# Altium PCB PCB.PcbDoc
Units mm, origin at the board's own origin, x right, y up, seen from the top; angles counter-clockwise.
Board outline 88.9 x 65.79 mm, 2 copper layers (Top Layer, Bottom Layer); 55 components, 33 nets, 171 pads, 169 vias.
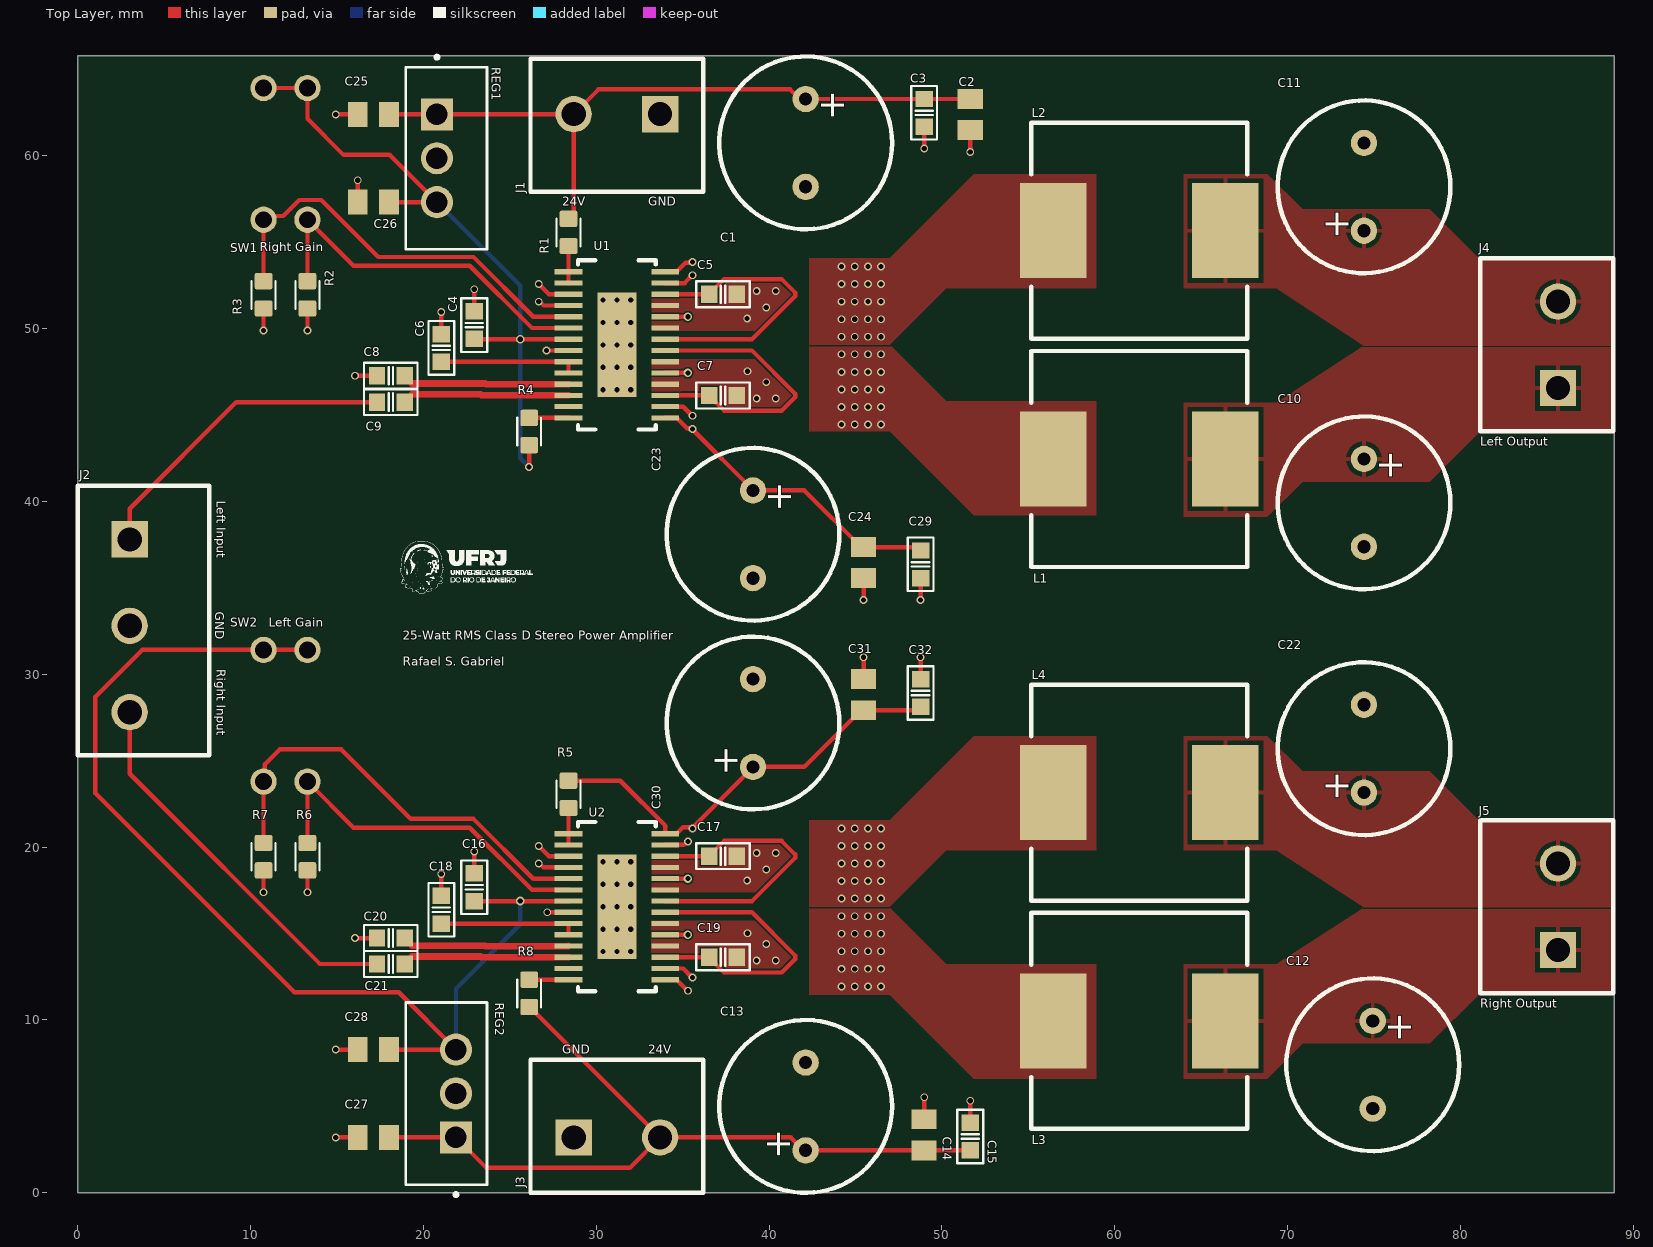
[diagram p0: Top Layer view]
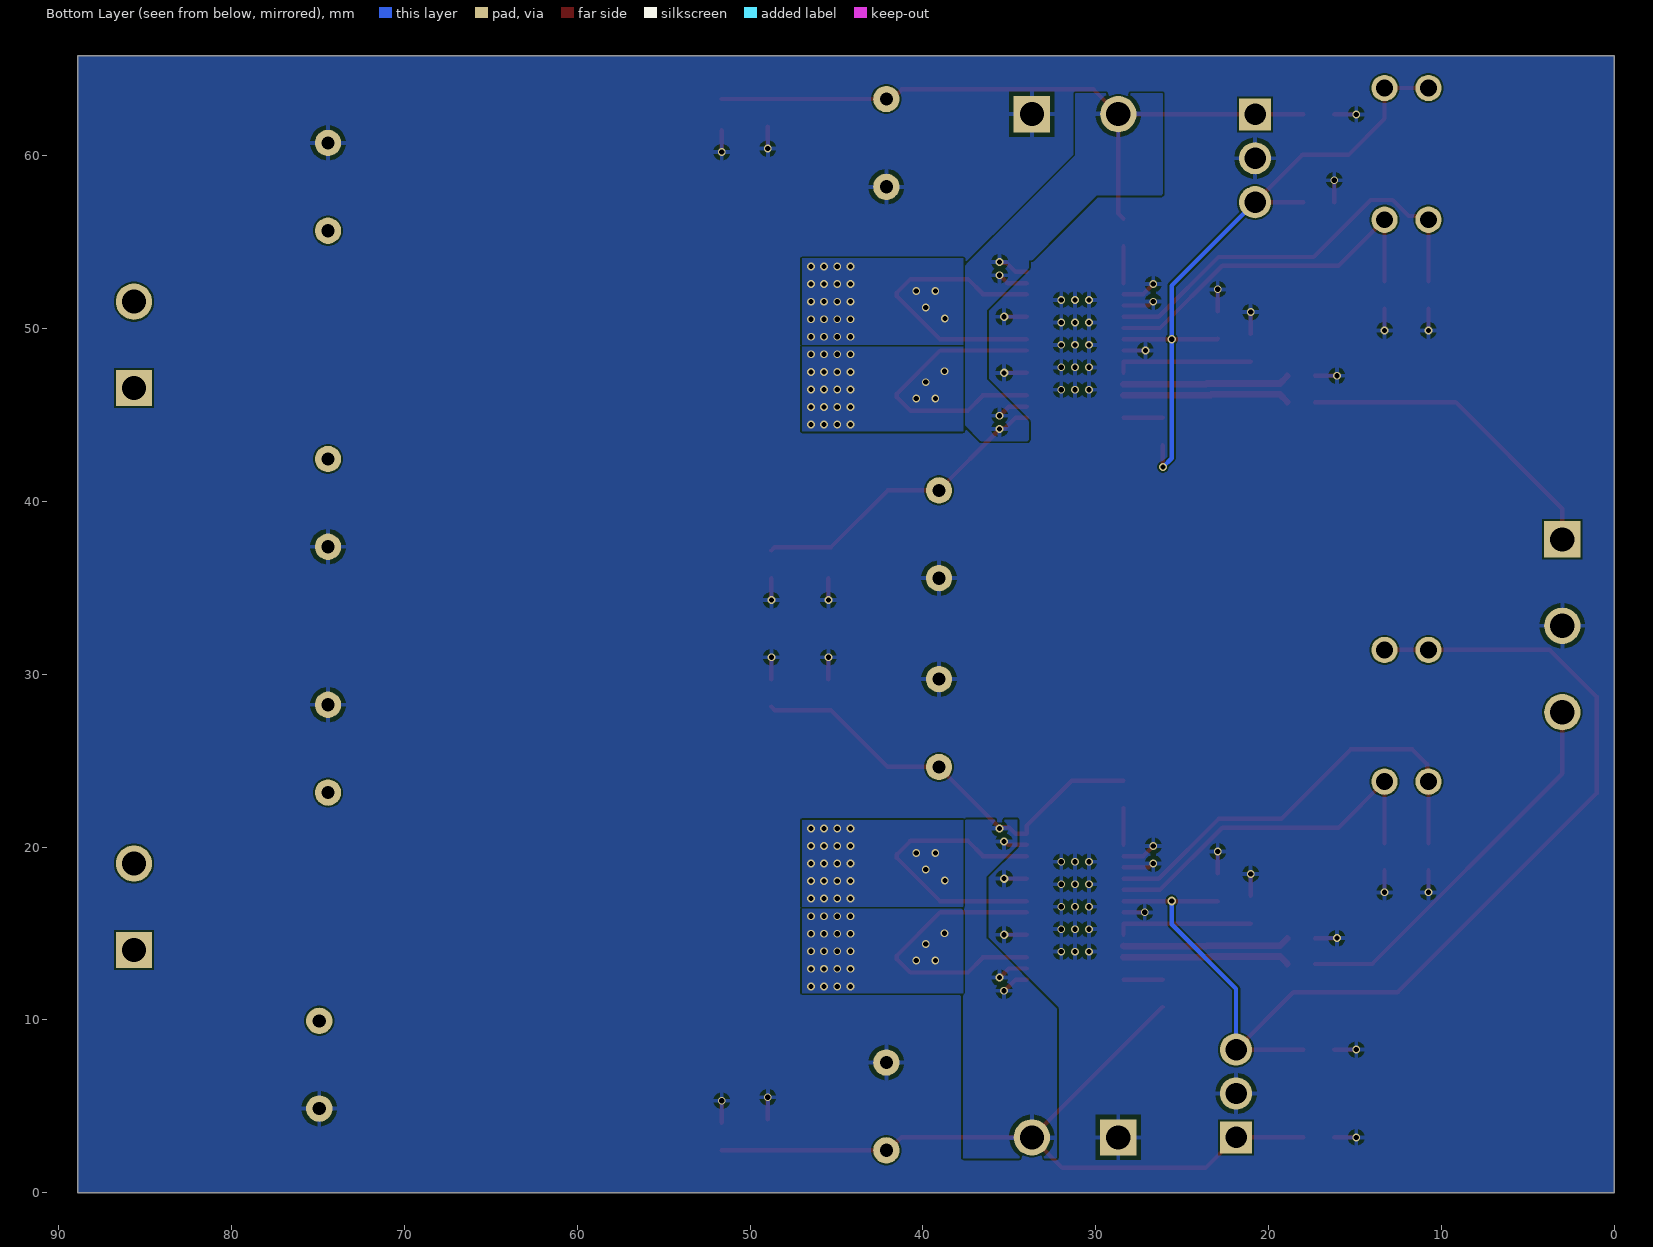
[diagram p1: Bottom Layer view, seen from below]
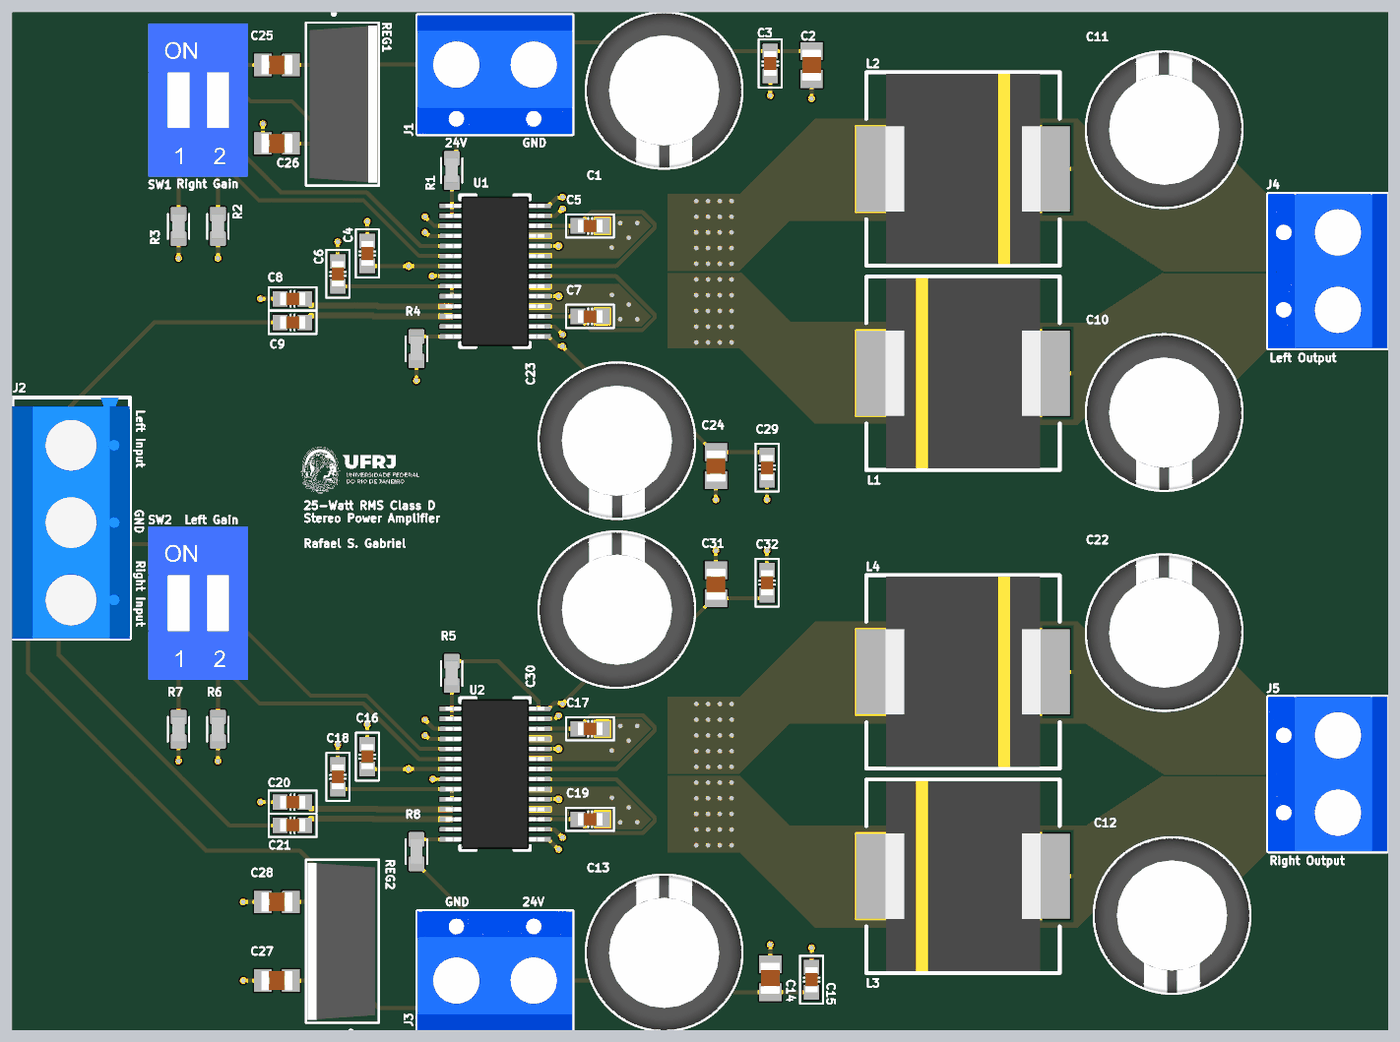
[diagram p2: 3D render of the assembled board from above, using the file's embedded part models]

## Layer stack, top to bottom
Top Solder: solder mask 0.0102, Solder Resist, Dk 3.5
Top Layer: signal copper 0.0356
Dielectric 1: dielectric 0.32, FR-4, Dk 4.8
Bottom Layer: signal copper 0.0356
Bottom Solder: solder mask 0.0102, Solder Resist, Dk 3.5

## Board outline
0,0 0,65.786 88.9,65.786 88.9,0

## Design rules (kind name [scope] priority, off if disabled: settings)
Clearance [All] p1: gap=0.1 ignorepadtopadclearanceinfootprint=FALSE except(0.15: SMDPad-SMDPad)
DiffPairsRouting [All] p1: maxlimit=0.254 minlimit=0.254 mostfreqgap=0.254 toplayer_minwidth=0.381 toplayer_maxwidth=0.381 toplayer_prefwidth=0.381 bottomlayer_minwidth=0.381 bottomlayer_maxwidth=0.381 bottomlayer_prefwidth=0.381 maxuncoupledlength=12.7
HoleSize [All] p1: absolutevalues=TRUE maxlimit=6.3 minlimit=0.15 maxpercent=80.000 minpercent=20.000
HoleToHoleClearance [All] p1: gap=0.45 allowstackedmicrovias=TRUE
MinimumSolderMaskSliver [All] p1: minsoldermaskwidth=0.025
PlaneConnect OutputPlane1 [InNet('NetC17_2')] p1: planeconnectstyle=Direct reliefexpansion=0.508 reliefentries=4 reliefconductorwidth=0.254 reliefairgap=0.254
PlaneConnect OutputPlane2 [InNet('NetC19_2')] p2: planeconnectstyle=Direct reliefexpansion=0.508 reliefentries=4 reliefconductorwidth=0.254 reliefairgap=0.254
PlaneConnect OutputPlane3 [InNet('NetC5_2')] p3: planeconnectstyle=Direct reliefexpansion=0.508 reliefentries=4 reliefconductorwidth=0.254 reliefairgap=0.254
PlaneConnect OutputPlane4 [InNet('NetC7_2')] p4: planeconnectstyle=Direct reliefexpansion=0.508 reliefentries=4 reliefconductorwidth=0.254 reliefairgap=0.254
PlaneConnect [All] p5: planeconnectstyle=Direct reliefexpansion=0.508 reliefentries=4 reliefconductorwidth=0.254 reliefairgap=0.254
PolygonConnect Output1 [InNet('NetC19_2')] p1: connectstyle=Direct reliefconductorwidth=0.254 reliefentries=4 polygonreliefangle="90 Angle" airgapwidth=0.254
PolygonConnect Output2 [InNet('NetC17_2')] p2: connectstyle=Direct reliefconductorwidth=0.254 reliefentries=4 polygonreliefangle="90 Angle" airgapwidth=0.254
PolygonConnect Output3 [InNet('NetC7_2')] p3: connectstyle=Direct reliefconductorwidth=0.254 reliefentries=4 polygonreliefangle="90 Angle" airgapwidth=0.254
PolygonConnect Output4 [InNet('NetC5_2')] p4: connectstyle=Direct reliefconductorwidth=0.254 reliefentries=4 polygonreliefangle="90 Angle" airgapwidth=0.254
PolygonConnect [All] p5: connectstyle=Relief reliefconductorwidth=0.254 reliefentries=4 polygonreliefangle="90 Angle" airgapwidth=0.254
RoutingVias [All] p1: holewidth=0.711 width=1.27 viastyle="Through Hole" minholewidth=0.711 minwidth=1.27 maxholewidth=0.711 maxwidth=1.27
SilkToSilkClearance [All] p1: silktosilkclearance=0.025
SilkToSolderMaskClearance [IsPad] p1: minsilkscreentomaskgap=0.025 clearancetoexposedcopper=TRUE
SolderMaskExpansion [All] p1: expansion=0.102 istentingtop=FALSE
SupplyNets "Schematic Supply Nets_4" [InNet('AVCC_L')] p1: voltage=0.000
SupplyNets "Schematic Supply Nets_1" [InNet('AVCC_R')] p2: voltage=0.000
SupplyNets "Schematic Supply Nets_3" [InNet('+24_R')] p3: voltage=0.000
SupplyNets "Schematic Supply Nets_2" [InNet('+24_L')] p4: voltage=0.000
SupplyNets "Schematic Supply Nets" [InNet('GND')] p5: voltage=0.000
UnRoutedNet [All] p1: checkbadconnections=TRUE
Width [All] p1: maxlimit=0.254 minlimit=0.1 preferedwidth=0.254
22 further rules are at their usual default settings.

## Classes and differential pairs
component class Amp2: C13 C14 C15 C16 C17 C18 C19 C20 C21 C30 C31 C32 R5 R6 R7 R8 SW2 U2
component class Schematic: C10 C11 C12 C22 C25 C26 C27 C28 J1 J2 J3 J4 J5 L1 L2 L3 L4 REG1 REG2
component class Amp1: C1 C2 C3 C4 C5 C6 C7 C8 C9 C23 C24 C29 R1 R2 R3 R4 SW1 U1
differential pair INPUTR: +INPUTR_P -INPUTR_N
differential pair INPUTL: +INPUTL_P -INPUTL_N

## Components (designator, comment, footprint, x,y, rotation, side; value= is the part's Value field where it differs from the comment)
C1 "100uF" CAPRADIAL_16X10 42.116,60.746 r270 top
C2 "0.1uF" CERAMIC0805 51.641,62.386 r90 top
C3 "1nF" CERAMIC0603 48.974,62.486 r90 top
C4 "1uF" CERAMIC0603 22.939,50.205 r270 top
C5 "0.47uF" CERAMIC0603 37.334,51.987 r0 top
C6 "1uF" CERAMIC0603 21.034,48.887 r90 top
C7 "0.47uF" CERAMIC0603 37.334,46.137 r0 top
C8 "1uF" CERAMIC0603 18.113,47.272 r0 top
C9 "1uF" CERAMIC0603 18.113,45.748 r0 top
C10 "1uF" CAPRADIAL_16X10 74.422,39.918 r270 top
C11 "1uF" CAPRADIAL_16X10 74.422,58.206 r90 top
C12 "1uF" CAPRADIAL_16X10 74.93,7.406 r270 top
C13 "100uF" CAPRADIAL_16X10 42.116,4.993 r90 top
C14 "0.1uF" CERAMIC0805 48.974,3.353 r270 top
C15 "1nF" CERAMIC0603 51.641,3.253 r270 top
C16 "1uF" CERAMIC0603 22.939,17.675 r270 top
C17 "0.47uF" CERAMIC0603 37.334,19.475 r0 top
C18 "1uF" CERAMIC0603 21.034,16.375 r90 top
C19 "0.47uF" CERAMIC0603 37.334,13.625 r0 top
C20 "1uF" CERAMIC0603 18.113,14.735 r0 top
C21 "1uF" CERAMIC0603 18.113,13.236 r0 top
C22 "1uF" CAPRADIAL_16X10 74.422,25.694 r90 top
C23 "100uF" CAPRADIAL_16X10 39.068,38.1 r270 top
C24 "0.1uF" CERAMIC0805 45.466,36.46 r90 top
C25 "0.33uF" CERAMIC0805 17.097,62.397 r0 top
C26 "0.1uF" CERAMIC0805 17.097,57.317 r0 top
C27 "0.33uF" CERAMIC0805 17.097,3.2 r0 top
C28 "0.1uF" CERAMIC0805 17.097,8.28 r0 top
C29 "1nF" CERAMIC0603 48.768,36.36 r90 top
C30 "100uF" CAPRADIAL_16X10 39.068,27.178 r90 top
C31 "0.1uF" CERAMIC0805 45.466,28.818 r270 top
C32 "1nF" CERAMIC0603 48.768,28.918 r270 top
J1 "Borne KF301-2P" "Borne KF301-2P" 31.194,61.762 r180 top
J2 "Borne KF301-3P" "Borne KF301-3P" 3,32.806 r270 top
J3 "Borne KF301-2P" "Borne KF301-2P" 31.194,3.85 r0 top
J4 "Speaker" "Borne KF301-2P" 85,49.062 r90 top
J5 "Speaker" "Borne KF301-2P" 85,16.55 r90 top
L1 "33uH" DR124 61.428,42.458 r0 top
L2 "33uH" DR124 61.428,55.666 r180 top
L3 "33uH" DR124 61.428,9.946 r0 top
L4 "33uH" DR124 61.428,23.154 r180 top
R1 "100k" RES0603 28.394,55.567 r270 top
R2 "100k" RES0603 13.287,51.955 r90 top
R3 "100k" RES0603 10.747,51.955 r90 top
R4 "100k" RES0603 26.114,44.047 r270 top
R5 "100k" RES0603 28.394,23.055 r270 top
R6 "100k" RES0603 13.287,19.443 r90 top
R7 "100k" RES0603 10.747,19.443 r90 top
R8 "100k" RES0603 26.114,11.535 r270 top
REG1 "LM7812" TO-220-3 20.78,62.397 r270 top
REG2 "LM7812" TO-220-3 21.88,3.2 r90 top
SW1 "DIP SWITCH - 2 POS" "KF1001 - 2 POS" 12.017,60.111 r0 top
SW2 "DIP SWITCH - 2 POS" "KF1001 - 2 POS" 12.017,27.599 r0 top
U1 "TPA3112D1" HTSSOP-28 31.194,49.062 r270 top
U2 "TPA3112D1" HTSSOP-28 31.194,16.55 r270 top

## Footprints (in the part's own frame and the unit in brackets; to place one, negate y for a bottom-side part, rotate by r counter-clockwise, add the part's x,y. Pads: shape width x height; smd on the part's side, far side on the other; paste and mask are expansions set on the pad)
"Borne KF301-2P" [mm]
  rect 2.1x2.1 hole 1.4: 1(-2.5,-0.65)
  round 2.1 hole 1.4: 2(2.5,-0.65)
  silkscreen extent -5,-3.85 5,3.85, body extent -5,-3.85 5,3.85, height 10
"Borne KF301-3P" [mm]
  rect 2.1x2.1 hole 1.4: 1(-5,0)
  round 2.1 hole 1.4: 2(0,0) 3(5,0)
  silkscreen extent -8.1,-3 7.5,4.6, body extent -8.1,-3 7.5,4.6, height 10
CAPRADIAL_16X10 [mil]
  round 60 hole 30: N(100,0) P(-100,0)
  silkscreen extent -197,-197 197,197, body extent -197,-197 197,197, height 630
CERAMIC0603 [mm]
  rect 0.95x1 smd: 1(-0.8,0) 2(0.8,0)
  silkscreen extent -1.55,-0.75 1.55,0.75, body extent -0.8,-0.4 0.8,0.4, height 0.8
CERAMIC0805 [mm]
  rect 1.15x1.45 smd: 1(-0.9,0) 2(0.9,0)
  body extent -1,-0.63 1,0.63, height 0.94
DR124 [mm]
  rect 3.85x5.5 smd: 1(-4.975,0) 2(4.975,0)
  silkscreen extent -6.25,-6.25 6.25,6.25, body extent -5,-6.15 5,6.15, height 4.5
HTSSOP-28 [mm]
  rect 0.3x1.6 smd mask+0.07: 1(-4.225,-2.8) 2(-3.575,-2.8) 3(-2.925,-2.8) 4(-2.275,-2.8) 5(-1.625,-2.8) 6(-0.975,-2.8) 7(-0.325,-2.8) 8(0.325,-2.8) 9(0.975,-2.8) 10(1.625,-2.8) 11(2.275,-2.8) 12(2.925,-2.8) 13(3.575,-2.8) 14(4.225,-2.8) 15(4.225,2.8) 16(3.575,2.8) 17(2.925,2.8) 18(2.275,2.8) 19(1.625,2.8) 20(0.975,2.8) 21(0.325,2.8) 22(-0.325,2.8) 23(-0.975,2.8) 24(-1.625,2.8) 25(-2.275,2.8) 26(-2.925,2.8) 27(-3.575,2.8) 28(-4.225,2.8)
  rect 6.03x2.26 smd mask+0.07: 29(0,0)
  silkscreen extent -4.9,-2.25 4.9,2.25, body extent -4.85,-3.2 4.85,3.2, height 1.13
"KF1001 - 2 POS" [mil]
  round 60 hole 38.19: 1(-50,-150) 2(-50,150) 3(50,150) 4(50,-150)
  body extent -127,-195 127,195, height 264
RES0603 [mm]
  rrect20% 0.94x1.02 smd: 1(-0.79,0) 2(0.79,0)
  silkscreen extent -0.8,-0.69 0.8,0.69, body extent -0.81,-0.4 0.79,0.4, height 0.45
TO-220-3 [mm]
  rect 1.86x1.86 / inner round 1.86 / far side rect 1.86x1.86 hole 1.24: 1(0,0)
  round 1.86 hole 1.24: 2(2.54,0) 3(5.08,0)
  silkscreen extent -3.41,-1.8 7.81,2.9, body extent -2.54,-1.56 7.62,2.79, height 20.4

## Part data
C1 C10 C11 C12 C13 C22 C23 C30: library part "CAP ELETRO/TANT", Package="RADIAL-2 Panasonic", Check_prices=https://www.snapeda.com/parts/EEU-EE2W560/Panasonic/view-part/2337485/?ref=eda, Digi-Key_Part_Number=P13679-ND, MF=Panasonic, MP=EEU-EE2W560, Purchase-URL=https://pricing.snapeda.com/search/part/EEU-EE2W560/?ref=eda, SnapEDA_Link=https://www.snapeda.com/parts/EEU-EE2W560/Panasonic/view-part/2337485/?ref=snap
C2 C3 C4 C5 C6 C7 C8 C9 C14 C15 C16 C17 C18 C19 C20 C21 C24 C25 C26 C27 C28 C29 C31 C32: library part Cap, Package=None, Availability="In Stock", Check_prices=https://www.snapeda.com/parts/TAJC226M025RNJ/KEMET/view-part/?ref=eda, MF=KEMET, MP=TAJC226M025RNJ, Price=None, Purchase-URL=https://pricing.snapeda.com/search/part/TAJC226M025RNJ/?ref=eda, SnapEDA_Link=https://www.snapeda.com/parts/TAJC226M025RNJ/KEMET/view-part/?ref=snap
J1 J3: "2 Pin Terminal Block 5mm Pitch", Package=None, Availability=Unavailable, MP=KF301-2P, Price=None
J4 J5: library part "Borne KF301-2P", "2 Pin Terminal Block 5mm Pitch", Package=None, Availability=Unavailable, MP=KF301-2P, Price=None
L1 L2 L3 L4: library part Inductor
R1 R2 R3 R4 R5 R6 R7 R8: library part "RESISTOR SMD", Package=None, Availability=Unavailable, MP=3-1879460-6, Price=None
REG1 REG2: library part LM78XX, "Regulador de tensão linha LM78XX", Package="TO-263-3 Texas Instruments", Availability="In Stock", Check_prices=https://www.snapeda.com/parts/LM7805S/NOPB/Texas+Instruments/view-part/?ref=eda, MF="Texas Instruments", MP=LM7805S/NOPB, Price=None, Purchase-URL=https://pricing.snapeda.com/search/part/LM7805S/NOPB/?ref=eda, SnapEDA_Link=https://www.snapeda.com/parts/LM7805S/NOPB/Texas+Instruments/view-part/?ref=snap
U1 U2: "25W Filter-Free Mono Class-D Audio Power Amplifier"

## Via types
v1: diameter 0.45, hole 0.3, Top Layer to Bottom Layer, 163 vias
v2: diameter 0.5, hole 0.3, Top Layer to Bottom Layer, 4 vias
v3: diameter 0.508, hole 0.3, Top Layer to Bottom Layer, 2 vias

## Nets (pads, with @x,y where several pads share a name; then routed paths per layer and width w, separated by ;. In a path a pad name is that pad's centre, name@x,y a point inside that pad or via, vN(x,y) a via of type N, cw(c..) or ccw(c..) an arc to the next point about the centre after c; other vN are vias at no path point)
+24_L: C13.P C14.2 C15.2 C27.2 C30.P C31.2 C32.2 J3.2 R5.1 R8.2 REG2.1 U2.15 U2.16 U2.27 U2.28 | length 75.9
  Top Layer w0.254: C27.2 REG2.1 23.643,1.437 31.931,1.437 J3.2 ; R8.2 26.154,10.745 33.694,3.205 J3.2 ; R5.1 31.392,23.845 33.994,21.243 U2.28 34.644,20.775 35.026,21.157 35.432,21.157 35.507,21.082 v1(35.56,21.082) 35.56,21.106 39.068,24.614 C30.P 42.036,24.638 45.316,27.918 C31.2 48.568,27.918 C32.2 ; U2.15 34.644,12.325 35.285,11.684 v1(35.306,11.684) ; U2.16 35.031,12.975 v1(35.56,12.446) ; U2.27 35.067,20.125 35.262,20.32 v1(35.306,20.32) ; C15.2 C14.2 C13.P 41.994,2.453 41.247,3.2 J3.2
+24_R: C1.P C2.2 C3.2 C23.P C24.2 C25.2 C29.2 J1.2 R1.1 REG1.1 U1.15 U1.16 U1.27 U1.28 | length 64
  Top Layer w0.254: C25.2 REG1.1 20.795,62.412 J1.2 ; R1.1 28.688,56.652 28.688,62.407 J1.2 ; U1.15 34.644,44.837 35.248,44.234 35.522,44.234 v1(35.56,44.196) 35.56,44.172 39.068,40.664 C23.P 42.036,40.64 45.316,37.36 C24.2 48.568,37.36 C29.2 ; U1.16 35.031,45.487 v1(35.56,44.958) ; U1.27 35.111,52.637 v1(35.56,53.086) ; U1.28 34.644,53.287 35.168,53.81 35.522,53.81 v1(35.56,53.848) ; C2.2 C3.2 C1.P 41.772,63.286 41.215,63.843 30.125,63.843 J1.2
AVCC_L: C16.2 C28.2 REG2.3 SW2.2 SW2.3 U2.7 | length 65.5
  Top Layer w0.254: SW2.3 SW2.2 3.723,31.409 1.016,28.702 1.016,23.114 12.533,11.597 18.563,11.597 REG2.3 C28.2 ; C16.2 v3(25.606,16.875) U2.7
  Bottom Layer w0.254: REG2.3 21.88,11.808 25.606,15.534 v3(25.606,16.875)
AVCC_R: C4.2 C26.2 R4.2 REG1.3 SW1.2 SW1.3 U1.7 | length 40.9
  Top Layer w0.254: SW1.2 SW1.3 13.287,62.143 15.377,60.053 18.044,60.053 REG1.3 C26.2 ; C4.2 22.957,49.387 v3(25.606,49.387) U1.7 ; v1(26.114,41.987) R4.2
  Bottom Layer w0.254: REG1.3 25.606,52.491 v3(25.606,49.387) 25.606,42.495 v1(26.114,41.987)
GAIN0_LEFT: R7.2 SW2.1 U2.5 | length 25.6
  Top Layer w0.254: R7.2 SW2.1 10.813,23.855 10.813,24.783 11.684,25.654 15.24,25.654 19.264,21.63 22.895,21.63 26.35,18.175 U2.5
GAIN0_RIGHT: R3.2 SW1.1 U1.5 | length 24.5
  Top Layer w0.254: R3.2 SW1.1 10.966,56.52 11.89,56.52 12.814,57.444 14.082,57.444 17.384,54.142 22.895,54.142 26.35,50.687 U1.5
GAIN1_LEFT: R6.2 SW2.4 U2.6 | length 21.3
  Top Layer w0.254: R6.2 SW2.4 15.954,21.122 22.685,21.122 26.282,17.525 U2.6
GAIN1_RIGHT: R2.2 SW1.4 U1.6 | length 21.3
  Top Layer w0.254: R2.2 SW1.4 15.954,53.634 22.685,53.634 26.282,50.037 U1.6
GND: C1.N C2.1 C3.1 C4.1 C6.2 C8.1 C10.N C11.N C12.N C13.N C14.1 C15.1 C16.1 C18.2 C20.1 C22.N C23.N C24.1 C25.1 C26.1 C27.1 C28.1 C29.1 C30.N C31.1 C32.1 J1.1 J2.2 J3.1 R2.1 R3.1 R6.1 R7.1 REG1.2 REG2.2 U1.3 U1.4 U1.8 U1.19 U1.24 U1.29 U2.3 U2.4 U2.8 U2.19 U2.24 U2.29 | length 43.2
  Top Layer w0.254: v1(10.747,17.383) R7.1 ; v1(10.747,49.895) R3.1 ; v1(13.287,17.383) R6.1 ; v1(13.287,49.895) R2.1 ; v1(14.927,3.2) C27.1 ; v1(14.927,8.28) C28.1 ; v1(14.927,62.397) C25.1 ; v1(16.043,14.735) C20.1 ; v1(16.043,47.272) C8.1 ; C26.1 v1(16.197,58.587) ; C18.2 v1(21.034,18.445) ; C6.2 v1(21.034,50.957) ; C16.1 v1(22.939,19.745) ; C4.1 v1(22.939,52.275) ; v1(26.67,19.05) 26.723,19.05 26.948,18.825 U2.4 ; v1(26.67,20.066) 27.261,19.475 U2.3 ; v1(26.67,51.562) 26.723,51.562 26.948,51.337 U1.4 ; v1(26.67,52.578) 27.261,51.987 U1.3 ; v1(27.124,48.737) U1.8 ; v1(27.164,16.225) U2.8 ; U2.19 v2(35.3,14.925) ; U2.24 v2(35.3,18.175) ; U1.19 v2(35.3,47.437) ; U1.24 v2(35.3,50.687) ; C31.1 v1(45.466,30.988) ; v1(45.466,34.29) C24.1 ; C32.1 v1(48.768,30.988) ; v1(48.768,34.29) C29.1 ; C14.1 v1(48.974,5.523) ; v1(48.974,60.416) C3.1 ; C15.1 v1(51.641,5.323) ; v1(51.641,60.216) C2.1
  other v1: 30.394,13.95 31.194,13.95 31.994,13.95 30.394,15.25 31.194,15.25 31.994,15.25 30.394,16.55 31.194,16.55 31.994,16.55 30.394,17.85 31.194,17.85 31.994,17.85 30.394,19.15 31.194,19.15 31.994,19.15 30.394,46.462 31.194,46.462 31.994,46.462 30.394,47.762 31.194,47.762 31.994,47.762 30.394,49.062 31.194,49.062 31.994,49.062 30.394,50.362 31.194,50.362 31.994,50.362 30.394,51.662 31.194,51.662 31.994,51.662
INPUTL_N: C20.2 U2.11 | length 9.7
  Top Layer w0.381: C20.2 18.913,14.71 19.32,14.303 23.581,14.303 23.617,14.268 28.387,14.268 U2.11
INPUTL_P: C21.2 U2.12 | length 9.7
  Top Layer w0.381: C21.2 18.913,13.261 19.32,13.668 23.318,13.668 23.354,13.633 28.386,13.633 U2.12
INPUTR_N: C8.2 U1.11 | length 9.7
  Top Layer w0.381: C8.2 18.913,47.247 19.332,46.828 23.575,46.828 23.623,46.78 28.387,46.78 U1.11
INPUTR_P: C9.2 U1.12 | length 9.7
  Top Layer w0.381: C9.2 18.913,45.773 19.332,46.193 23.312,46.193 23.36,46.145 28.386,46.145 U1.12
NetC5_1: C5.1 U1.22 U1.26 | length 17
  Top Layer w0.254: U1.22 39.012,49.387 41.503,51.878 41.503,52.088 40.723,52.868 37.39,52.868 36.534,52.012 C5.1 U1.26
NetC5_2: C5.2 L2.2 U1.23 U1.25
  other v1: 44.196,49.53 44.958,49.53 45.72,49.53 46.482,49.53 44.196,50.546 44.958,50.546 45.72,50.546 46.482,50.546 38.73,50.586 39.83,51.221 44.196,51.562 44.958,51.562 45.72,51.562 46.482,51.562 39.28,52.174 40.38,52.174 44.196,52.578 44.958,52.578 45.72,52.578 46.482,52.578 44.196,53.594 44.958,53.594 45.72,53.594 46.482,53.594
NetC6_1: C6.1 U1.9 U1.10 | length 8
  Top Layer w0.254: C6.1 U1.9 U1.10
NetC7_1: C7.1 U1.17 U1.21 | length 17
  Top Layer w0.254: U1.17 C7.1 36.534,46.112 37.39,45.256 40.731,45.256 41.503,46.028 41.503,46.238 39.004,48.737 U1.21
NetC7_2: C7.2 L1.1 U1.18 U1.20
  other v1: 44.196,44.45 44.958,44.45 45.72,44.45 46.482,44.45 44.196,45.466 44.958,45.466 45.72,45.466 46.482,45.466 39.28,45.951 40.38,45.951 44.196,46.482 44.958,46.482 45.72,46.482 46.482,46.482 39.83,46.903 44.196,47.498 44.958,47.498 45.72,47.498 46.482,47.498 38.745,47.53 44.196,48.514 44.958,48.514 45.72,48.514 46.482,48.514
NetC9_1: C9.1 J2.1 | length 18.6
  Top Layer w0.254: J2.1 3,39.576 9.172,45.748 C9.1
NetC10_P: C10.P J4.1 L1.2
NetC11_P: C11.P J4.2 L2.1
NetC12_P: C12.P J5.1 L3.2
NetC17_1: C17.1 U2.22 U2.26 | length 17
  Top Layer w0.254: U2.22 39.012,16.875 41.503,19.366 41.503,19.576 40.723,20.356 37.39,20.356 36.534,19.5 C17.1 U2.26
NetC17_2: C17.2 L4.2 U2.23 U2.25
  other v1: 44.196,17.018 44.958,17.018 45.72,17.018 46.482,17.018 44.196,18.034 44.958,18.034 45.72,18.034 46.482,18.034 38.73,18.074 39.83,18.709 44.196,19.05 44.958,19.05 45.72,19.05 46.482,19.05 39.28,19.662 40.38,19.662 44.196,20.066 44.958,20.066 45.72,20.066 46.482,20.066 44.196,21.082 44.958,21.082 45.72,21.082 46.482,21.082
NetC18_1: C18.1 U2.9 U2.10 | length 8
  Top Layer w0.254: C18.1 U2.9 U2.10
NetC19_1: C19.1 U2.17 U2.21 | length 17
  Top Layer w0.254: U2.17 C19.1 36.534,13.6 37.39,12.744 40.731,12.744 41.503,13.516 41.503,13.726 39.004,16.225 U2.21
NetC19_2: C19.2 L3.1 U2.18 U2.20
  other v1: 44.196,11.938 44.958,11.938 45.72,11.938 46.482,11.938 44.196,12.954 44.958,12.954 45.72,12.954 46.482,12.954 39.28,13.439 40.38,13.439 44.196,13.97 44.958,13.97 45.72,13.97 46.482,13.97 39.83,14.391 44.196,14.986 44.958,14.986 45.72,14.986 46.482,14.986 38.745,15.018 44.196,16.002 44.958,16.002 45.72,16.002 46.482,16.002
NetC21_1: C21.1 J2.3 | length 22.4
  Top Layer w0.254: J2.3 3,24.243 14.007,13.236 C21.1
NetC22_P: C22.P J5.2 L4.1
NetR1_2: R1.2 U1.1 U1.2 | length 2.1
  Top Layer w0.254: U1.2 U1.1 R1.2
NetR4_1: R4.1 U1.14 | length 2.3
  Top Layer w0.254: R4.1 U1.14
NetR5_2: R5.2 U2.1 U2.2 | length 2.1
  Top Layer w0.254: U2.2 U2.1 R5.2
NetR8_1: R8.1 U2.14 | length 2.3
  Top Layer w0.254: R8.1 U2.14
pads on no net: U1.13 U2.13

## Polygon pours and split planes (outlines as drawn)
GND on Bottom Layer "NONET_L01_P-001" (solid, pour order 37): 0,0 0,65.786 88.9,65.786 88.9,0
+24_R on Bottom Layer "NONET_L01_P-001" (solid, pour order 16): 26.133,63.613 31.175,63.613 31.175,60.029 37.563,53.641 37.563,44.401 36.655,43.493 33.943,43.493 33.88,43.556 33.88,44.648 36.3,47.068 36.3,51.068 33.88,53.488 33.88,53.97 33.671,53.97 29.924,57.717 26.196,57.717 26.133,57.78
NetC7_2 on Bottom Layer "NETC7_2_L02_P014" (solid, pour order 14): 46.99,44.062 46.99,49.062 37.671,49.062 37.671,44.062
NetC17_2 on Bottom Layer "NETC17_2_L02_P011" (solid, pour order 11): 46.99,16.55 46.99,21.55 37.671,21.55 37.671,16.55
NetC19_2 on Bottom Layer "NETC19_2_L02_P012" (solid, pour order 12): 46.99,11.55 46.99,16.55 37.671,16.55 37.671,11.55
NetC5_2 on Bottom Layer "NETC5_2_L02_P013" (solid, pour order 13): 46.99,49.062 46.99,54.062 37.671,54.062 37.671,49.062
+24_L on Bottom Layer "NONET_L01_P-001" (solid, pour order 21): 37.671,1.999 37.671,21.59 34.544,21.59 34.544,20.066 36.322,18.288 36.322,14.732 32.258,10.668 32.258,1.999
NetC5_2 on Top Layer "NONET_L01_P-001" (solid, remove dead copper, pour order 17): 33.194,49.887 33.201,49.894 33.201,52.668 40.923,52.668 41.503,51.983 39.513,49.888 34.804,49.888
NetC17_2 on Top Layer "NONET_L01_P-001" (solid, pour order 22): 33.195,17.376 33.202,17.383 33.202,20.158 40.924,20.158 41.504,19.473 39.514,17.378 34.805,17.378
NetC19_2 on Top Layer "NONET_L01_P-001" (solid, pour order 23): 33.194,15.725 33.194,13.481 33.196,13.479 33.196,12.829 40.707,12.829 41.501,13.624 39.4,15.725 34.746,15.725
NetC7_2 on Top Layer "NONET_L01_P-001" (solid, pour order 19): 33.196,48.234 33.196,45.991 33.198,45.989 33.198,45.339 40.708,45.339 41.503,46.133 39.401,48.235 34.748,48.235
NetC12_P on Top Layer "NONET_L01_P-001" (solid, pour order 35): 64.008,6.604 68.834,6.604 70.866,8.636 78.232,8.636 81.026,11.43 88.9,11.43 88.9,16.51 74.422,16.51 69.342,13.208 67.564,13.208 64.008,13.208
NetC19_2 on Top Layer "NONET_L01_P-001" (solid, pour order 34): 42.33,11.47 42.33,16.47 46.99,16.47 50.252,13.208 58.928,13.208 58.928,6.604 51.856,6.604 46.99,11.47
NetC7_2 on Top Layer "NONET_L01_P-001" (solid, pour order 32): 42.33,44.062 42.33,49.062 46.99,49.062 50.252,45.8 58.928,45.8 58.928,39.196 51.856,39.196 46.99,44.062
NetC10_P on Top Layer "NONET_L01_P-001" (solid, pour order 33): 64.008,39.116 68.834,39.116 70.866,41.148 78.232,41.148 81.026,43.942 88.9,43.942 88.9,49.022 74.422,49.022 69.342,45.72 67.564,45.72 64.008,45.72
NetC22_P on Top Layer "NONET_L01_P-001" (solid, pour order 30): 64.008,26.416 68.834,26.416 70.866,24.384 78.232,24.384 81.026,21.59 88.9,21.59 88.9,16.51 74.422,16.51 69.342,19.812 67.564,19.812 64.008,19.812
NetC11_P on Top Layer "NONET_L01_P-001" (solid, pour order 29): 64.008,58.928 68.834,58.928 70.866,56.896 78.232,56.896 81.026,54.102 88.9,54.102 88.9,49.022 74.422,49.022 69.342,52.324 67.564,52.324 64.008,52.324
NetC17_2 on Top Layer "NONET_L01_P-001" (solid, pour order 27): 42.33,21.55 42.33,16.55 46.99,16.55 50.252,19.812 58.928,19.812 58.928,26.416 51.856,26.416 46.99,21.55
NetC5_2 on Top Layer "NONET_L01_P-001" (solid, pour order 26): 42.33,54.062 42.33,49.062 46.99,49.062 50.252,52.324 58.928,52.324 58.928,58.928 51.856,58.928 46.99,54.062

## Silkscreen, mask and mechanical layers (free items; w line width, h text height)
Top Overlay:
  drawing of 48 lines, arcs and shapes, not listed
  text "24V" at 28.017,57.114 h0.51
  text "GND" at 33.017,57.114 h0.51
  text "Right Gain" at 10.527,54.464 h0.51
  text "Left Output" at 81.153,43.222 h0.51
  text "Left Input" at 8.031,40.049 h0.51 r270
  text "GND" at 7.946,33.61 h0.51 r270
  text "Left Gain" at 11.049,32.746 h0.51
  text "25-Watt RMS Class D Stereo Power Amplifier /  / Rafael S. Gabriel" at 18.796,30.48 h0.51
  text "Right Input" at 8.031,30.303 h0.51 r270
  text "Right Output" at 81.153,10.71 h0.51
  text "GND" at 28.017,8.046 h0.51
  text "24V" at 33.017,8.046 h0.51
Mechanical 1:
  the board outline again, w0.254

## Text inside footprints (layer, text, board x,y; h text height)
C1: Top Overlay "+" at 43.005,63.794 h1.52 r270
C10: Top Overlay "+" at 75.311,42.966 h1.52 r270
C11: Top Overlay "+" at 73.533,55.158 h1.52 r90
C12: Top Overlay "+" at 75.819,10.454 h1.52 r270
C13: Top Overlay "+" at 41.227,1.945 h1.52 r90
C22: Top Overlay "+" at 73.533,22.646 h1.52 r90
C23: Top Overlay "+" at 39.957,41.148 h1.52 r270
C30: Top Overlay "+" at 38.179,24.13 h1.52 r90